# Altium PCB PCB1.PcbDoc (part 2 of 3)
Units mm, origin at the board's own origin, x right, y up, seen from the top; angles counter-clockwise.
Board outline 72.9 x 52.07 mm, 2 copper layers (Top Layer, Bottom Layer); 22 components, 35 nets, 99 pads, 0 vias.
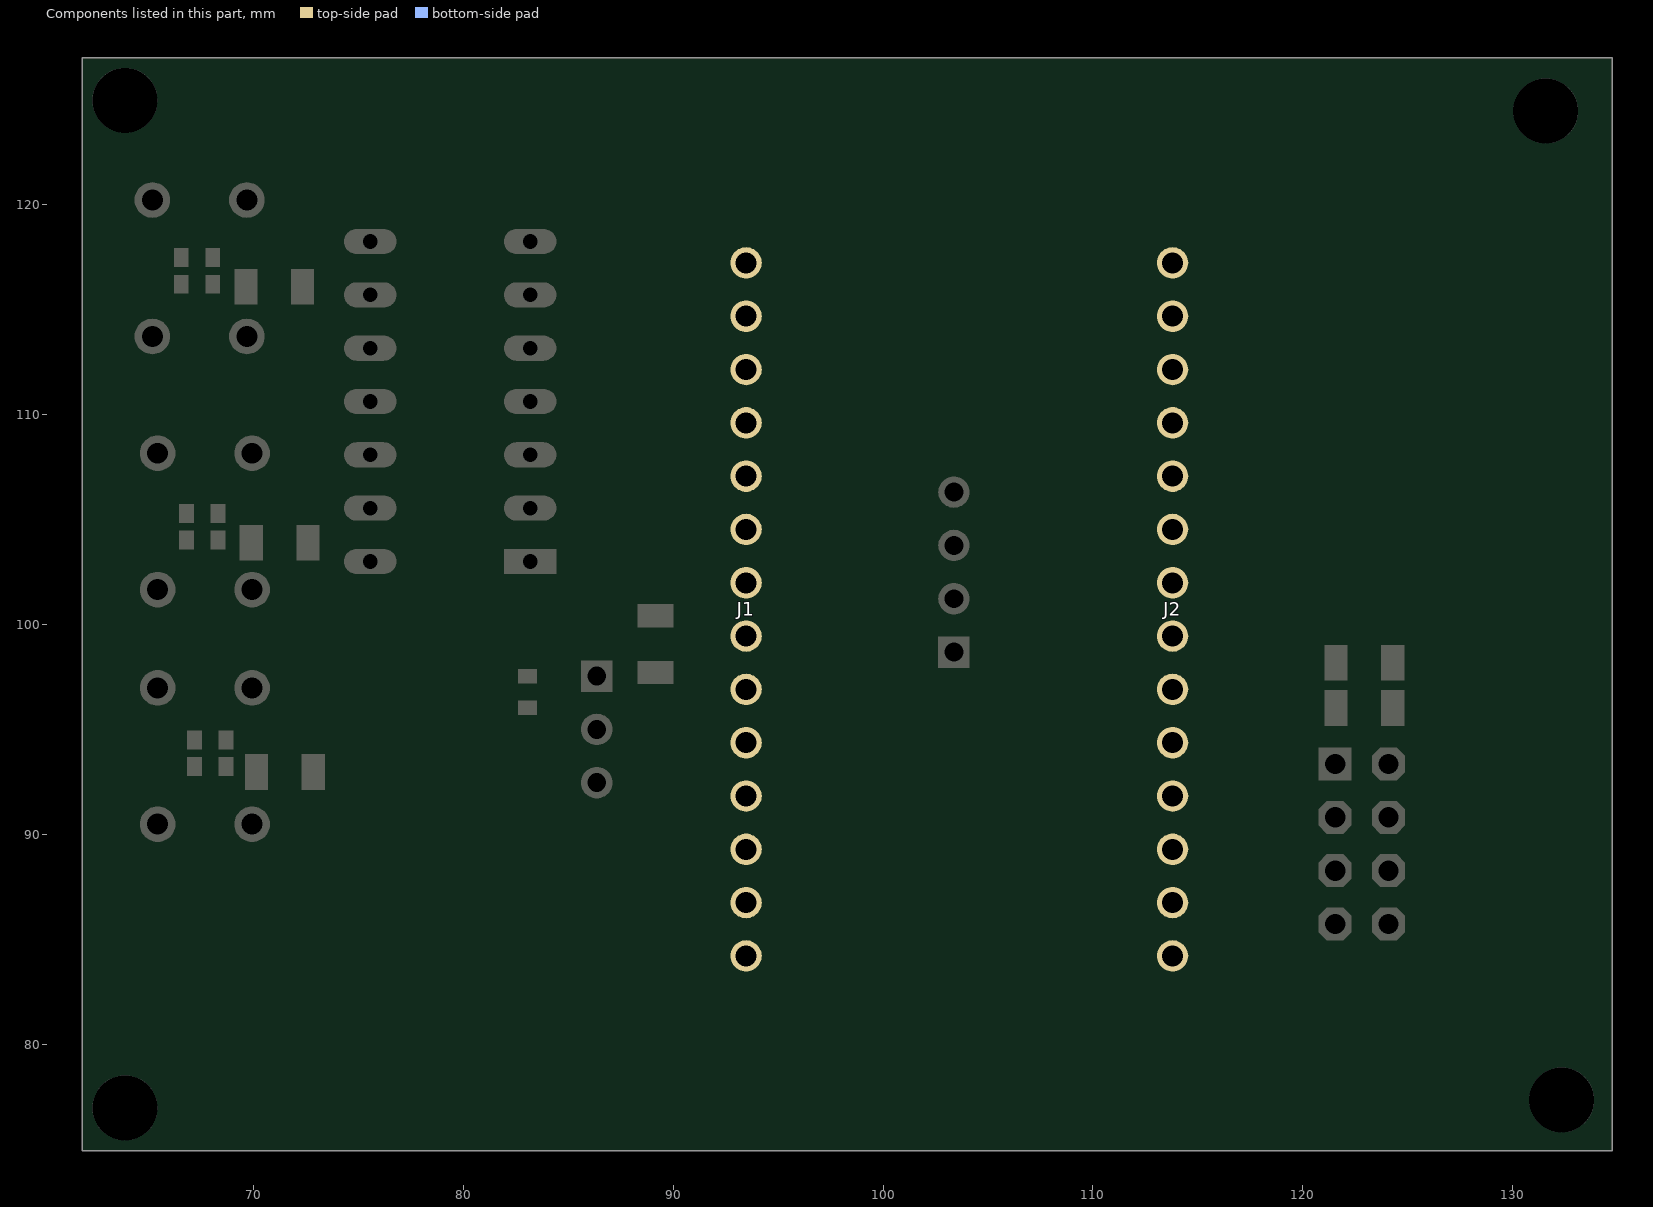
[diagram p2: the components of this part, seen from the top]

## Footprints (in the part's own frame and the unit in brackets; to place one, negate y for a bottom-side part, rotate by r counter-clockwise, add the part's x,y. Pads: shape width x height; smd on the part's side, far side on the other; paste and mask are expansions set on the pad) (continued)
STRIP-14 [mm]
  round 1.5 hole 1: 1(0,17.907) 2(0,15.367) 3(0,12.827) 4(0,10.287) 5(0,7.747) 6(0,5.207) 7(0,2.667) 8(0,0.127) 9(0,-2.413) 10(0,-4.953) 11(0,-7.493) 12(0,-10.033) 13(0,-12.573) 14(0,-15.113)
  Top Layer region: 0.953,18.707 0.953,17.107 -0.953,17.107 -0.953,18.707
  Top Layer region: 0.14,-14.313 0.446,-14.374 0.705,-14.547 0.879,-14.807 0.94,-15.113 0.94,-15.113 0.879,-15.419 0.705,-15.679 0.446,-15.852 0.14,-15.913 0.14,-15.913 -0.14,-15.913 -0.446,-15.852 -0.705,-15.679 -0.879,-15.419 -0.94,-15.113 -0.94,-15.113 -0.879,-14.807 -0.705,-14.547 -0.446,-14.374 -0.14,-14.313 -0.14,-14.313
  Top Layer region: 0.14,-11.773 0.446,-11.834 0.705,-12.007 0.879,-12.267 0.94,-12.573 0.94,-12.573 0.879,-12.879 0.705,-13.139 0.446,-13.312 0.14,-13.373 0.14,-13.373 -0.14,-13.373 -0.446,-13.312 -0.705,-13.139 -0.879,-12.879 -0.94,-12.573 -0.94,-12.573 -0.879,-12.267 -0.705,-12.007 -0.446,-11.834 -0.14,-11.773 -0.14,-11.773
  Top Layer region: 0.14,-9.233 0.446,-9.294 0.705,-9.467 0.879,-9.727 0.94,-10.033 0.94,-10.033 0.879,-10.339 0.705,-10.599 0.446,-10.772 0.14,-10.833 0.14,-10.833 -0.14,-10.833 -0.446,-10.772 -0.705,-10.599 -0.879,-10.339 -0.94,-10.033 -0.94,-10.033 -0.879,-9.727 -0.705,-9.467 -0.446,-9.294 -0.14,-9.233 -0.14,-9.233
  Top Layer region: 0.14,-6.693 0.446,-6.754 0.705,-6.927 0.879,-7.187 0.94,-7.493 0.94,-7.493 0.879,-7.799 0.705,-8.059 0.446,-8.232 0.14,-8.293 0.14,-8.293 -0.14,-8.293 -0.446,-8.232 -0.705,-8.059 -0.879,-7.799 -0.94,-7.493 -0.94,-7.493 -0.879,-7.187 -0.705,-6.927 -0.446,-6.754 -0.14,-6.693 -0.14,-6.693
  Top Layer region: 0.14,-4.153 0.446,-4.214 0.705,-4.387 0.879,-4.647 0.94,-4.953 0.94,-4.953 0.879,-5.259 0.705,-5.519 0.446,-5.692 0.14,-5.753 0.14,-5.753 -0.14,-5.753 -0.446,-5.692 -0.705,-5.519 -0.879,-5.259 -0.94,-4.953 -0.94,-4.953 -0.879,-4.647 -0.705,-4.387 -0.446,-4.214 -0.14,-4.153 -0.14,-4.153
  Top Layer region: 0.14,-1.613 0.446,-1.674 0.705,-1.847 0.879,-2.107 0.94,-2.413 0.94,-2.413 0.879,-2.719 0.705,-2.979 0.446,-3.152 0.14,-3.213 0.14,-3.213 -0.14,-3.213 -0.446,-3.152 -0.705,-2.979 -0.879,-2.719 -0.94,-2.413 -0.94,-2.413 -0.879,-2.107 -0.705,-1.847 -0.446,-1.674 -0.14,-1.613 -0.14,-1.613
  Top Layer region: 0.14,0.927 0.446,0.866 0.705,0.693 0.879,0.433 0.94,0.127 0.94,0.127 0.879,-0.179 0.705,-0.439 0.446,-0.612 0.14,-0.673 0.14,-0.673 -0.14,-0.673 -0.446,-0.612 -0.705,-0.439 -0.879,-0.179 -0.94,0.127 -0.94,0.127 -0.879,0.433 -0.705,0.693 -0.446,0.866 -0.14,0.927 -0.14,0.927
  Top Layer region: 0.14,3.467 0.446,3.406 0.705,3.233 0.879,2.973 0.94,2.667 0.94,2.667 0.879,2.361 0.705,2.101 0.446,1.928 0.14,1.867 0.14,1.867 -0.14,1.867 -0.446,1.928 -0.705,2.101 -0.879,2.361 -0.94,2.667 -0.94,2.667 -0.879,2.973 -0.705,3.233 -0.446,3.406 -0.14,3.467 -0.14,3.467
  Top Layer region: 0.14,6.007 0.446,5.946 0.705,5.773 0.879,5.513 0.94,5.207 0.94,5.207 0.879,4.901 0.705,4.641 0.446,4.468 0.14,4.407 0.14,4.407 -0.14,4.407 -0.446,4.468 -0.705,4.641 -0.879,4.901 -0.94,5.207 -0.94,5.207 -0.879,5.513 -0.705,5.773 -0.446,5.946 -0.14,6.007 -0.14,6.007
  Top Layer region: 0.14,8.547 0.446,8.486 0.705,8.313 0.879,8.053 0.94,7.747 0.94,7.747 0.879,7.441 0.705,7.181 0.446,7.008 0.14,6.947 0.14,6.947 -0.14,6.947 -0.446,7.008 -0.705,7.181 -0.879,7.441 -0.94,7.747 -0.94,7.747 -0.879,8.053 -0.705,8.313 -0.446,8.486 -0.14,8.547 -0.14,8.547
  Top Layer region: 0.14,11.087 0.446,11.026 0.705,10.853 0.879,10.593 0.94,10.287 0.94,10.287 0.879,9.981 0.705,9.721 0.446,9.548 0.14,9.487 0.14,9.487 -0.14,9.487 -0.446,9.548 -0.705,9.721 -0.879,9.981 -0.94,10.287 -0.94,10.287 -0.879,10.593 -0.705,10.853 -0.446,11.026 -0.14,11.087 -0.14,11.087
  Top Layer region: 0.14,13.627 0.446,13.566 0.705,13.393 0.879,13.133 0.94,12.827 0.94,12.827 0.879,12.521 0.705,12.261 0.446,12.088 0.14,12.027 0.14,12.027 -0.14,12.027 -0.446,12.088 -0.705,12.261 -0.879,12.521 -0.94,12.827 -0.94,12.827 -0.879,13.133 -0.705,13.393 -0.446,13.566 -0.14,13.627 -0.14,13.627
  Top Layer region: 0.14,16.167 0.446,16.106 0.705,15.933 0.879,15.673 0.94,15.367 0.94,15.367 0.879,15.061 0.705,14.801 0.446,14.628 0.14,14.567 0.14,14.567 -0.14,14.567 -0.446,14.628 -0.705,14.801 -0.879,15.061 -0.94,15.367 -0.94,15.367 -0.879,15.673 -0.705,15.933 -0.446,16.106 -0.14,16.167 -0.14,16.167
  Bottom Layer region: 0.152,-14.313 0.454,-14.373 0.709,-14.544 0.88,-14.799 0.94,-15.1 0.94,-15.1 0.94,-15.126 0.88,-15.427 0.709,-15.682 0.454,-15.853 0.152,-15.913 0.152,-15.913 -0.152,-15.913 -0.343,-15.888 -0.533,-15.811 -0.699,-15.697 -0.699,-15.469 -0.714,-15.391 -0.758,-15.325 -0.824,-15.281 -0.902,-15.265 -0.902,-15.265 -0.953,-15.265 -0.953,-15.862 -1.003,-15.913 -1.854,-15.913 -1.905,-15.862 -1.905,-14.364 -1.854,-14.313 -1.003,-14.313 -0.953,-14.364 -0.953,-14.961 -0.902,-14.961 -0.824,-14.945 -0.758,-14.901 -0.714,-14.835 -0.699,-14.757 -0.699,-14.757 -0.699,-14.529 -0.533,-14.414 -0.343,-14.351 -0.152,-14.313
  Bottom Layer region: 0.152,-14.313 0.454,-14.373 0.709,-14.544 0.88,-14.799 0.94,-15.1 0.94,-15.1 0.94,-15.126 0.88,-15.427 0.709,-15.682 0.454,-15.853 0.152,-15.913 0.152,-15.913 -0.152,-15.913 -0.343,-15.888 -0.533,-15.811 -0.699,-15.697 -0.699,-15.469 -0.714,-15.391 -0.758,-15.325 -0.824,-15.281 -0.902,-15.265 -0.902,-15.265 -0.953,-15.265 -0.953,-15.862 -1.003,-15.913 -1.854,-15.913 -1.905,-15.862 -1.905,-14.364 -1.854,-14.313 -1.003,-14.313 -0.953,-14.364 -0.953,-14.961 -0.902,-14.961 -0.824,-14.945 -0.758,-14.901 -0.714,-14.835 -0.699,-14.757 -0.699,-14.757 -0.699,-14.529 -0.533,-14.414 -0.343,-14.351 -0.152,-14.313
  Bottom Layer region: 0.152,-14.313 0.454,-14.373 0.709,-14.544 0.88,-14.799 0.94,-15.1 0.94,-15.1 0.94,-15.126 0.88,-15.427 0.709,-15.682 0.454,-15.853 0.152,-15.913 0.152,-15.913 -0.152,-15.913 -0.343,-15.888 -0.533,-15.811 -0.699,-15.697 -0.699,-15.469 -0.714,-15.391 -0.758,-15.325 -0.824,-15.281 -0.902,-15.265 -0.902,-15.265 -0.953,-15.265 -0.953,-15.862 -1.003,-15.913 -1.854,-15.913 -1.905,-15.862 -1.905,-14.364 -1.854,-14.313 -1.003,-14.313 -0.953,-14.364 -0.953,-14.961 -0.902,-14.961 -0.824,-14.945 -0.758,-14.901 -0.714,-14.835 -0.699,-14.757 -0.699,-14.757 -0.699,-14.529 -0.533,-14.414 -0.343,-14.351 -0.152,-14.313
  Bottom Layer region: 0.152,-14.313 0.454,-14.373 0.709,-14.544 0.88,-14.799 0.94,-15.1 0.94,-15.1 0.94,-15.126 0.88,-15.427 0.709,-15.682 0.454,-15.853 0.152,-15.913 0.152,-15.913 -0.152,-15.913 -0.343,-15.888 -0.533,-15.811 -0.699,-15.697 -0.699,-15.469 -0.714,-15.391 -0.758,-15.325 -0.824,-15.281 -0.902,-15.265 -0.902,-15.265 -0.953,-15.265 -0.953,-15.862 -1.003,-15.913 -1.854,-15.913 -1.905,-15.862 -1.905,-14.364 -1.854,-14.313 -1.003,-14.313 -0.953,-14.364 -0.953,-14.961 -0.902,-14.961 -0.824,-14.945 -0.758,-14.901 -0.714,-14.835 -0.699,-14.757 -0.699,-14.757 -0.699,-14.529 -0.533,-14.414 -0.343,-14.351 -0.152,-14.313
  Bottom Layer region: 0.152,-14.313 0.454,-14.373 0.709,-14.544 0.88,-14.799 0.94,-15.1 0.94,-15.1 0.94,-15.126 0.88,-15.427 0.709,-15.682 0.454,-15.853 0.152,-15.913 0.152,-15.913 -0.152,-15.913 -0.343,-15.888 -0.533,-15.811 -0.699,-15.697 -0.699,-15.469 -0.714,-15.391 -0.758,-15.325 -0.824,-15.281 -0.902,-15.265 -0.902,-15.265 -0.953,-15.265 -0.953,-15.862 -1.003,-15.913 -1.854,-15.913 -1.905,-15.862 -1.905,-14.364 -1.854,-14.313 -1.003,-14.313 -0.953,-14.364 -0.953,-14.961 -0.902,-14.961 -0.824,-14.945 -0.758,-14.901 -0.714,-14.835 -0.699,-14.757 -0.699,-14.757 -0.699,-14.529 -0.533,-14.414 -0.343,-14.351 -0.152,-14.313
  Bottom Layer region: 0.152,-14.313 0.454,-14.373 0.709,-14.544 0.88,-14.799 0.94,-15.1 0.94,-15.1 0.94,-15.126 0.88,-15.427 0.709,-15.682 0.454,-15.853 0.152,-15.913 0.152,-15.913 -0.152,-15.913 -0.343,-15.888 -0.533,-15.811 -0.699,-15.697 -0.699,-15.469 -0.714,-15.391 -0.758,-15.325 -0.824,-15.281 -0.902,-15.265 -0.902,-15.265 -0.953,-15.265 -0.953,-15.862 -1.003,-15.913 -1.854,-15.913 -1.905,-15.862 -1.905,-14.364 -1.854,-14.313 -1.003,-14.313 -0.953,-14.364 -0.953,-14.961 -0.902,-14.961 -0.824,-14.945 -0.758,-14.901 -0.714,-14.835 -0.699,-14.757 -0.699,-14.757 -0.699,-14.529 -0.533,-14.414 -0.343,-14.351 -0.152,-14.313
  Bottom Layer region: 0.152,-14.313 0.454,-14.373 0.709,-14.544 0.88,-14.799 0.94,-15.1 0.94,-15.1 0.94,-15.126 0.88,-15.427 0.709,-15.682 0.454,-15.853 0.152,-15.913 0.152,-15.913 -0.152,-15.913 -0.343,-15.888 -0.533,-15.811 -0.699,-15.697 -0.699,-15.469 -0.714,-15.391 -0.758,-15.325 -0.824,-15.281 -0.902,-15.265 -0.902,-15.265 -0.953,-15.265 -0.953,-15.862 -1.003,-15.913 -1.854,-15.913 -1.905,-15.862 -1.905,-14.364 -1.854,-14.313 -1.003,-14.313 -0.953,-14.364 -0.953,-14.961 -0.902,-14.961 -0.824,-14.945 -0.758,-14.901 -0.714,-14.835 -0.699,-14.757 -0.699,-14.757 -0.699,-14.529 -0.533,-14.414 -0.343,-14.351 -0.152,-14.313
  Bottom Layer region: 0.152,-11.773 0.454,-11.833 0.709,-12.004 0.88,-12.259 0.94,-12.56 0.94,-12.56 0.94,-12.586 0.88,-12.887 0.709,-13.142 0.454,-13.313 0.152,-13.373 0.152,-13.373 -0.152,-13.373 -0.343,-13.348 -0.533,-13.271 -0.699,-13.157 -0.699,-12.929 -0.714,-12.851 -0.758,-12.785 -0.824,-12.741 -0.902,-12.725 -0.902,-12.725 -0.953,-12.725 -0.953,-13.322 -1.003,-13.373 -1.854,-13.373 -1.905,-13.322 -1.905,-11.824 -1.854,-11.773 -1.003,-11.773 -0.953,-11.824 -0.953,-12.421 -0.902,-12.421 -0.824,-12.405 -0.758,-12.361 -0.714,-12.295 -0.699,-12.217 -0.699,-12.217 -0.699,-11.989 -0.533,-11.874 -0.343,-11.811 -0.152,-11.773
  Bottom Layer region: 0.152,-11.773 0.454,-11.833 0.709,-12.004 0.88,-12.259 0.94,-12.56 0.94,-12.56 0.94,-12.586 0.88,-12.887 0.709,-13.142 0.454,-13.313 0.152,-13.373 0.152,-13.373 -0.152,-13.373 -0.343,-13.348 -0.533,-13.271 -0.699,-13.157 -0.699,-12.929 -0.714,-12.851 -0.758,-12.785 -0.824,-12.741 -0.902,-12.725 -0.902,-12.725 -0.953,-12.725 -0.953,-13.322 -1.003,-13.373 -1.854,-13.373 -1.905,-13.322 -1.905,-11.824 -1.854,-11.773 -1.003,-11.773 -0.953,-11.824 -0.953,-12.421 -0.902,-12.421 -0.824,-12.405 -0.758,-12.361 -0.714,-12.295 -0.699,-12.217 -0.699,-12.217 -0.699,-11.989 -0.533,-11.874 -0.343,-11.811 -0.152,-11.773
  Bottom Layer region: 0.152,-11.773 0.454,-11.833 0.709,-12.004 0.88,-12.259 0.94,-12.56 0.94,-12.56 0.94,-12.586 0.88,-12.887 0.709,-13.142 0.454,-13.313 0.152,-13.373 0.152,-13.373 -0.152,-13.373 -0.343,-13.348 -0.533,-13.271 -0.699,-13.157 -0.699,-12.929 -0.714,-12.851 -0.758,-12.785 -0.824,-12.741 -0.902,-12.725 -0.902,-12.725 -0.953,-12.725 -0.953,-13.322 -1.003,-13.373 -1.854,-13.373 -1.905,-13.322 -1.905,-11.824 -1.854,-11.773 -1.003,-11.773 -0.953,-11.824 -0.953,-12.421 -0.902,-12.421 -0.824,-12.405 -0.758,-12.361 -0.714,-12.295 -0.699,-12.217 -0.699,-12.217 -0.699,-11.989 -0.533,-11.874 -0.343,-11.811 -0.152,-11.773
  Bottom Layer region: 0.152,-11.773 0.454,-11.833 0.709,-12.004 0.88,-12.259 0.94,-12.56 0.94,-12.56 0.94,-12.586 0.88,-12.887 0.709,-13.142 0.454,-13.313 0.152,-13.373 0.152,-13.373 -0.152,-13.373 -0.343,-13.348 -0.533,-13.271 -0.699,-13.157 -0.699,-12.929 -0.714,-12.851 -0.758,-12.785 -0.824,-12.741 -0.902,-12.725 -0.902,-12.725 -0.953,-12.725 -0.953,-13.322 -1.003,-13.373 -1.854,-13.373 -1.905,-13.322 -1.905,-11.824 -1.854,-11.773 -1.003,-11.773 -0.953,-11.824 -0.953,-12.421 -0.902,-12.421 -0.824,-12.405 -0.758,-12.361 -0.714,-12.295 -0.699,-12.217 -0.699,-12.217 -0.699,-11.989 -0.533,-11.874 -0.343,-11.811 -0.152,-11.773
  Bottom Layer region: 0.152,-11.773 0.454,-11.833 0.709,-12.004 0.88,-12.259 0.94,-12.56 0.94,-12.56 0.94,-12.586 0.88,-12.887 0.709,-13.142 0.454,-13.313 0.152,-13.373 0.152,-13.373 -0.152,-13.373 -0.343,-13.348 -0.533,-13.271 -0.699,-13.157 -0.699,-12.929 -0.714,-12.851 -0.758,-12.785 -0.824,-12.741 -0.902,-12.725 -0.902,-12.725 -0.953,-12.725 -0.953,-13.322 -1.003,-13.373 -1.854,-13.373 -1.905,-13.322 -1.905,-11.824 -1.854,-11.773 -1.003,-11.773 -0.953,-11.824 -0.953,-12.421 -0.902,-12.421 -0.824,-12.405 -0.758,-12.361 -0.714,-12.295 -0.699,-12.217 -0.699,-12.217 -0.699,-11.989 -0.533,-11.874 -0.343,-11.811 -0.152,-11.773
  Bottom Layer region: 0.152,-11.773 0.454,-11.833 0.709,-12.004 0.88,-12.259 0.94,-12.56 0.94,-12.56 0.94,-12.586 0.88,-12.887 0.709,-13.142 0.454,-13.313 0.152,-13.373 0.152,-13.373 -0.152,-13.373 -0.343,-13.348 -0.533,-13.271 -0.699,-13.157 -0.699,-12.929 -0.714,-12.851 -0.758,-12.785 -0.824,-12.741 -0.902,-12.725 -0.902,-12.725 -0.953,-12.725 -0.953,-13.322 -1.003,-13.373 -1.854,-13.373 -1.905,-13.322 -1.905,-11.824 -1.854,-11.773 -1.003,-11.773 -0.953,-11.824 -0.953,-12.421 -0.902,-12.421 -0.824,-12.405 -0.758,-12.361 -0.714,-12.295 -0.699,-12.217 -0.699,-12.217 -0.699,-11.989 -0.533,-11.874 -0.343,-11.811 -0.152,-11.773
  Bottom Layer region: 0.152,-11.773 0.454,-11.833 0.709,-12.004 0.88,-12.259 0.94,-12.56 0.94,-12.56 0.94,-12.586 0.88,-12.887 0.709,-13.142 0.454,-13.313 0.152,-13.373 0.152,-13.373 -0.152,-13.373 -0.343,-13.348 -0.533,-13.271 -0.699,-13.157 -0.699,-12.929 -0.714,-12.851 -0.758,-12.785 -0.824,-12.741 -0.902,-12.725 -0.902,-12.725 -0.953,-12.725 -0.953,-13.322 -1.003,-13.373 -1.854,-13.373 -1.905,-13.322 -1.905,-11.824 -1.854,-11.773 -1.003,-11.773 -0.953,-11.824 -0.953,-12.421 -0.902,-12.421 -0.824,-12.405 -0.758,-12.361 -0.714,-12.295 -0.699,-12.217 -0.699,-12.217 -0.699,-11.989 -0.533,-11.874 -0.343,-11.811 -0.152,-11.773
  Bottom Layer region: 0.152,-9.233 0.454,-9.293 0.709,-9.464 0.88,-9.719 0.94,-10.02 0.94,-10.02 0.94,-10.046 0.88,-10.347 0.709,-10.602 0.454,-10.773 0.152,-10.833 0.152,-10.833 -0.152,-10.833 -0.343,-10.808 -0.533,-10.731 -0.699,-10.617 -0.699,-10.389 -0.714,-10.311 -0.758,-10.245 -0.824,-10.201 -0.902,-10.185 -0.902,-10.185 -0.953,-10.185 -0.953,-10.782 -1.003,-10.833 -1.854,-10.833 -1.905,-10.782 -1.905,-9.284 -1.854,-9.233 -1.003,-9.233 -0.953,-9.284 -0.953,-9.881 -0.902,-9.881 -0.824,-9.865 -0.758,-9.821 -0.714,-9.755 -0.699,-9.677 -0.699,-9.677 -0.699,-9.449 -0.533,-9.335 -0.343,-9.271 -0.152,-9.233
  Bottom Layer region: 0.152,-9.233 0.454,-9.293 0.709,-9.464 0.88,-9.719 0.94,-10.02 0.94,-10.02 0.94,-10.046 0.88,-10.347 0.709,-10.602 0.454,-10.773 0.152,-10.833 0.152,-10.833 -0.152,-10.833 -0.343,-10.808 -0.533,-10.731 -0.699,-10.617 -0.699,-10.389 -0.714,-10.311 -0.758,-10.245 -0.824,-10.201 -0.902,-10.185 -0.902,-10.185 -0.953,-10.185 -0.953,-10.782 -1.003,-10.833 -1.854,-10.833 -1.905,-10.782 -1.905,-9.284 -1.854,-9.233 -1.003,-9.233 -0.953,-9.284 -0.953,-9.881 -0.902,-9.881 -0.824,-9.865 -0.758,-9.821 -0.714,-9.755 -0.699,-9.677 -0.699,-9.677 -0.699,-9.449 -0.533,-9.335 -0.343,-9.271 -0.152,-9.233
  Bottom Layer region: 0.152,-9.233 0.454,-9.293 0.709,-9.464 0.88,-9.719 0.94,-10.02 0.94,-10.02 0.94,-10.046 0.88,-10.347 0.709,-10.602 0.454,-10.773 0.152,-10.833 0.152,-10.833 -0.152,-10.833 -0.343,-10.808 -0.533,-10.731 -0.699,-10.617 -0.699,-10.389 -0.714,-10.311 -0.758,-10.245 -0.824,-10.201 -0.902,-10.185 -0.902,-10.185 -0.953,-10.185 -0.953,-10.782 -1.003,-10.833 -1.854,-10.833 -1.905,-10.782 -1.905,-9.284 -1.854,-9.233 -1.003,-9.233 -0.953,-9.284 -0.953,-9.881 -0.902,-9.881 -0.824,-9.865 -0.758,-9.821 -0.714,-9.755 -0.699,-9.677 -0.699,-9.677 -0.699,-9.449 -0.533,-9.335 -0.343,-9.271 -0.152,-9.233
  Bottom Layer region: 0.152,-9.233 0.454,-9.293 0.709,-9.464 0.88,-9.719 0.94,-10.02 0.94,-10.02 0.94,-10.046 0.88,-10.347 0.709,-10.602 0.454,-10.773 0.152,-10.833 0.152,-10.833 -0.152,-10.833 -0.343,-10.808 -0.533,-10.731 -0.699,-10.617 -0.699,-10.389 -0.714,-10.311 -0.758,-10.245 -0.824,-10.201 -0.902,-10.185 -0.902,-10.185 -0.953,-10.185 -0.953,-10.782 -1.003,-10.833 -1.854,-10.833 -1.905,-10.782 -1.905,-9.284 -1.854,-9.233 -1.003,-9.233 -0.953,-9.284 -0.953,-9.881 -0.902,-9.881 -0.824,-9.865 -0.758,-9.821 -0.714,-9.755 -0.699,-9.677 -0.699,-9.677 -0.699,-9.449 -0.533,-9.335 -0.343,-9.271 -0.152,-9.233
  Bottom Layer region: 0.152,-9.233 0.454,-9.293 0.709,-9.464 0.88,-9.719 0.94,-10.02 0.94,-10.02 0.94,-10.046 0.88,-10.347 0.709,-10.602 0.454,-10.773 0.152,-10.833 0.152,-10.833 -0.152,-10.833 -0.343,-10.808 -0.533,-10.731 -0.699,-10.617 -0.699,-10.389 -0.714,-10.311 -0.758,-10.245 -0.824,-10.201 -0.902,-10.185 -0.902,-10.185 -0.953,-10.185 -0.953,-10.782 -1.003,-10.833 -1.854,-10.833 -1.905,-10.782 -1.905,-9.284 -1.854,-9.233 -1.003,-9.233 -0.953,-9.284 -0.953,-9.881 -0.902,-9.881 -0.824,-9.865 -0.758,-9.821 -0.714,-9.755 -0.699,-9.677 -0.699,-9.677 -0.699,-9.449 -0.533,-9.335 -0.343,-9.271 -0.152,-9.233
  Bottom Layer region: 0.152,-9.233 0.454,-9.293 0.709,-9.464 0.88,-9.719 0.94,-10.02 0.94,-10.02 0.94,-10.046 0.88,-10.347 0.709,-10.602 0.454,-10.773 0.152,-10.833 0.152,-10.833 -0.152,-10.833 -0.343,-10.808 -0.533,-10.731 -0.699,-10.617 -0.699,-10.389 -0.714,-10.311 -0.758,-10.245 -0.824,-10.201 -0.902,-10.185 -0.902,-10.185 -0.953,-10.185 -0.953,-10.782 -1.003,-10.833 -1.854,-10.833 -1.905,-10.782 -1.905,-9.284 -1.854,-9.233 -1.003,-9.233 -0.953,-9.284 -0.953,-9.881 -0.902,-9.881 -0.824,-9.865 -0.758,-9.821 -0.714,-9.755 -0.699,-9.677 -0.699,-9.677 -0.699,-9.449 -0.533,-9.335 -0.343,-9.271 -0.152,-9.233
  Bottom Layer region: 0.152,-9.233 0.454,-9.293 0.709,-9.464 0.88,-9.719 0.94,-10.02 0.94,-10.02 0.94,-10.046 0.88,-10.347 0.709,-10.602 0.454,-10.773 0.152,-10.833 0.152,-10.833 -0.152,-10.833 -0.343,-10.808 -0.533,-10.731 -0.699,-10.617 -0.699,-10.389 -0.714,-10.311 -0.758,-10.245 -0.824,-10.201 -0.902,-10.185 -0.902,-10.185 -0.953,-10.185 -0.953,-10.782 -1.003,-10.833 -1.854,-10.833 -1.905,-10.782 -1.905,-9.284 -1.854,-9.233 -1.003,-9.233 -0.953,-9.284 -0.953,-9.881 -0.902,-9.881 -0.824,-9.865 -0.758,-9.821 -0.714,-9.755 -0.699,-9.677 -0.699,-9.677 -0.699,-9.449 -0.533,-9.335 -0.343,-9.271 -0.152,-9.233
  Bottom Layer region: 0.152,-6.693 0.454,-6.753 0.709,-6.924 0.88,-7.179 0.94,-7.48 0.94,-7.48 0.94,-7.506 0.88,-7.807 0.709,-8.062 0.454,-8.233 0.152,-8.293 0.152,-8.293 -0.152,-8.293 -0.343,-8.268 -0.533,-8.191 -0.699,-8.077 -0.699,-7.849 -0.714,-7.771 -0.758,-7.705 -0.824,-7.661 -0.902,-7.645 -0.902,-7.645 -0.953,-7.645 -0.953,-8.242 -1.003,-8.293 -1.854,-8.293 -1.905,-8.242 -1.905,-6.744 -1.854,-6.693 -1.003,-6.693 -0.953,-6.744 -0.953,-7.341 -0.902,-7.341 -0.824,-7.325 -0.758,-7.281 -0.714,-7.215 -0.699,-7.137 -0.699,-7.137 -0.699,-6.909 -0.533,-6.794 -0.343,-6.731 -0.152,-6.693
  Bottom Layer region: 0.152,-6.693 0.454,-6.753 0.709,-6.924 0.88,-7.179 0.94,-7.48 0.94,-7.48 0.94,-7.506 0.88,-7.807 0.709,-8.062 0.454,-8.233 0.152,-8.293 0.152,-8.293 -0.152,-8.293 -0.343,-8.268 -0.533,-8.191 -0.699,-8.077 -0.699,-7.849 -0.714,-7.771 -0.758,-7.705 -0.824,-7.661 -0.902,-7.645 -0.902,-7.645 -0.953,-7.645 -0.953,-8.242 -1.003,-8.293 -1.854,-8.293 -1.905,-8.242 -1.905,-6.744 -1.854,-6.693 -1.003,-6.693 -0.953,-6.744 -0.953,-7.341 -0.902,-7.341 -0.824,-7.325 -0.758,-7.281 -0.714,-7.215 -0.699,-7.137 -0.699,-7.137 -0.699,-6.909 -0.533,-6.794 -0.343,-6.731 -0.152,-6.693
  Bottom Layer region: 0.152,-6.693 0.454,-6.753 0.709,-6.924 0.88,-7.179 0.94,-7.48 0.94,-7.48 0.94,-7.506 0.88,-7.807 0.709,-8.062 0.454,-8.233 0.152,-8.293 0.152,-8.293 -0.152,-8.293 -0.343,-8.268 -0.533,-8.191 -0.699,-8.077 -0.699,-7.849 -0.714,-7.771 -0.758,-7.705 -0.824,-7.661 -0.902,-7.645 -0.902,-7.645 -0.953,-7.645 -0.953,-8.242 -1.003,-8.293 -1.854,-8.293 -1.905,-8.242 -1.905,-6.744 -1.854,-6.693 -1.003,-6.693 -0.953,-6.744 -0.953,-7.341 -0.902,-7.341 -0.824,-7.325 -0.758,-7.281 -0.714,-7.215 -0.699,-7.137 -0.699,-7.137 -0.699,-6.909 -0.533,-6.794 -0.343,-6.731 -0.152,-6.693
  Bottom Layer region: 0.152,-6.693 0.454,-6.753 0.709,-6.924 0.88,-7.179 0.94,-7.48 0.94,-7.48 0.94,-7.506 0.88,-7.807 0.709,-8.062 0.454,-8.233 0.152,-8.293 0.152,-8.293 -0.152,-8.293 -0.343,-8.268 -0.533,-8.191 -0.699,-8.077 -0.699,-7.849 -0.714,-7.771 -0.758,-7.705 -0.824,-7.661 -0.902,-7.645 -0.902,-7.645 -0.953,-7.645 -0.953,-8.242 -1.003,-8.293 -1.854,-8.293 -1.905,-8.242 -1.905,-6.744 -1.854,-6.693 -1.003,-6.693 -0.953,-6.744 -0.953,-7.341 -0.902,-7.341 -0.824,-7.325 -0.758,-7.281 -0.714,-7.215 -0.699,-7.137 -0.699,-7.137 -0.699,-6.909 -0.533,-6.794 -0.343,-6.731 -0.152,-6.693
  Bottom Layer region: 0.152,-6.693 0.454,-6.753 0.709,-6.924 0.88,-7.179 0.94,-7.48 0.94,-7.48 0.94,-7.506 0.88,-7.807 0.709,-8.062 0.454,-8.233 0.152,-8.293 0.152,-8.293 -0.152,-8.293 -0.343,-8.268 -0.533,-8.191 -0.699,-8.077 -0.699,-7.849 -0.714,-7.771 -0.758,-7.705 -0.824,-7.661 -0.902,-7.645 -0.902,-7.645 -0.953,-7.645 -0.953,-8.242 -1.003,-8.293 -1.854,-8.293 -1.905,-8.242 -1.905,-6.744 -1.854,-6.693 -1.003,-6.693 -0.953,-6.744 -0.953,-7.341 -0.902,-7.341 -0.824,-7.325 -0.758,-7.281 -0.714,-7.215 -0.699,-7.137 -0.699,-7.137 -0.699,-6.909 -0.533,-6.794 -0.343,-6.731 -0.152,-6.693
  Bottom Layer region: 0.152,-6.693 0.454,-6.753 0.709,-6.924 0.88,-7.179 0.94,-7.48 0.94,-7.48 0.94,-7.506 0.88,-7.807 0.709,-8.062 0.454,-8.233 0.152,-8.293 0.152,-8.293 -0.152,-8.293 -0.343,-8.268 -0.533,-8.191 -0.699,-8.077 -0.699,-7.849 -0.714,-7.771 -0.758,-7.705 -0.824,-7.661 -0.902,-7.645 -0.902,-7.645 -0.953,-7.645 -0.953,-8.242 -1.003,-8.293 -1.854,-8.293 -1.905,-8.242 -1.905,-6.744 -1.854,-6.693 -1.003,-6.693 -0.953,-6.744 -0.953,-7.341 -0.902,-7.341 -0.824,-7.325 -0.758,-7.281 -0.714,-7.215 -0.699,-7.137 -0.699,-7.137 -0.699,-6.909 -0.533,-6.794 -0.343,-6.731 -0.152,-6.693
  Bottom Layer region: 0.152,-6.693 0.454,-6.753 0.709,-6.924 0.88,-7.179 0.94,-7.48 0.94,-7.48 0.94,-7.506 0.88,-7.807 0.709,-8.062 0.454,-8.233 0.152,-8.293 0.152,-8.293 -0.152,-8.293 -0.343,-8.268 -0.533,-8.191 -0.699,-8.077 -0.699,-7.849 -0.714,-7.771 -0.758,-7.705 -0.824,-7.661 -0.902,-7.645 -0.902,-7.645 -0.953,-7.645 -0.953,-8.242 -1.003,-8.293 -1.854,-8.293 -1.905,-8.242 -1.905,-6.744 -1.854,-6.693 -1.003,-6.693 -0.953,-6.744 -0.953,-7.341 -0.902,-7.341 -0.824,-7.325 -0.758,-7.281 -0.714,-7.215 -0.699,-7.137 -0.699,-7.137 -0.699,-6.909 -0.533,-6.794 -0.343,-6.731 -0.152,-6.693
  Bottom Layer region: 0.152,-4.153 0.454,-4.213 0.709,-4.384 0.88,-4.639 0.94,-4.94 0.94,-4.94 0.94,-4.966 0.88,-5.267 0.709,-5.522 0.454,-5.693 0.152,-5.753 0.152,-5.753 -0.152,-5.753 -0.343,-5.728 -0.533,-5.651 -0.699,-5.537 -0.699,-5.309 -0.714,-5.231 -0.758,-5.165 -0.824,-5.121 -0.902,-5.105 -0.902,-5.105 -0.953,-5.105 -0.953,-5.702 -1.003,-5.753 -1.854,-5.753 -1.905,-5.702 -1.905,-4.204 -1.854,-4.153 -1.003,-4.153 -0.953,-4.204 -0.953,-4.801 -0.902,-4.801 -0.824,-4.785 -0.758,-4.741 -0.714,-4.675 -0.699,-4.597 -0.699,-4.597 -0.699,-4.369 -0.533,-4.255 -0.343,-4.191 -0.152,-4.153
  Bottom Layer region: 0.152,-4.153 0.454,-4.213 0.709,-4.384 0.88,-4.639 0.94,-4.94 0.94,-4.94 0.94,-4.966 0.88,-5.267 0.709,-5.522 0.454,-5.693 0.152,-5.753 0.152,-5.753 -0.152,-5.753 -0.343,-5.728 -0.533,-5.651 -0.699,-5.537 -0.699,-5.309 -0.714,-5.231 -0.758,-5.165 -0.824,-5.121 -0.902,-5.105 -0.902,-5.105 -0.953,-5.105 -0.953,-5.702 -1.003,-5.753 -1.854,-5.753 -1.905,-5.702 -1.905,-4.204 -1.854,-4.153 -1.003,-4.153 -0.953,-4.204 -0.953,-4.801 -0.902,-4.801 -0.824,-4.785 -0.758,-4.741 -0.714,-4.675 -0.699,-4.597 -0.699,-4.597 -0.699,-4.369 -0.533,-4.255 -0.343,-4.191 -0.152,-4.153
  Bottom Layer region: 0.152,-4.153 0.454,-4.213 0.709,-4.384 0.88,-4.639 0.94,-4.94 0.94,-4.94 0.94,-4.966 0.88,-5.267 0.709,-5.522 0.454,-5.693 0.152,-5.753 0.152,-5.753 -0.152,-5.753 -0.343,-5.728 -0.533,-5.651 -0.699,-5.537 -0.699,-5.309 -0.714,-5.231 -0.758,-5.165 -0.824,-5.121 -0.902,-5.105 -0.902,-5.105 -0.953,-5.105 -0.953,-5.702 -1.003,-5.753 -1.854,-5.753 -1.905,-5.702 -1.905,-4.204 -1.854,-4.153 -1.003,-4.153 -0.953,-4.204 -0.953,-4.801 -0.902,-4.801 -0.824,-4.785 -0.758,-4.741 -0.714,-4.675 -0.699,-4.597 -0.699,-4.597 -0.699,-4.369 -0.533,-4.255 -0.343,-4.191 -0.152,-4.153
  Bottom Layer region: 0.152,-4.153 0.454,-4.213 0.709,-4.384 0.88,-4.639 0.94,-4.94 0.94,-4.94 0.94,-4.966 0.88,-5.267 0.709,-5.522 0.454,-5.693 0.152,-5.753 0.152,-5.753 -0.152,-5.753 -0.343,-5.728 -0.533,-5.651 -0.699,-5.537 -0.699,-5.309 -0.714,-5.231 -0.758,-5.165 -0.824,-5.121 -0.902,-5.105 -0.902,-5.105 -0.953,-5.105 -0.953,-5.702 -1.003,-5.753 -1.854,-5.753 -1.905,-5.702 -1.905,-4.204 -1.854,-4.153 -1.003,-4.153 -0.953,-4.204 -0.953,-4.801 -0.902,-4.801 -0.824,-4.785 -0.758,-4.741 -0.714,-4.675 -0.699,-4.597 -0.699,-4.597 -0.699,-4.369 -0.533,-4.255 -0.343,-4.191 -0.152,-4.153
  Bottom Layer region: 0.152,-4.153 0.454,-4.213 0.709,-4.384 0.88,-4.639 0.94,-4.94 0.94,-4.94 0.94,-4.966 0.88,-5.267 0.709,-5.522 0.454,-5.693 0.152,-5.753 0.152,-5.753 -0.152,-5.753 -0.343,-5.728 -0.533,-5.651 -0.699,-5.537 -0.699,-5.309 -0.714,-5.231 -0.758,-5.165 -0.824,-5.121 -0.902,-5.105 -0.902,-5.105 -0.953,-5.105 -0.953,-5.702 -1.003,-5.753 -1.854,-5.753 -1.905,-5.702 -1.905,-4.204 -1.854,-4.153 -1.003,-4.153 -0.953,-4.204 -0.953,-4.801 -0.902,-4.801 -0.824,-4.785 -0.758,-4.741 -0.714,-4.675 -0.699,-4.597 -0.699,-4.597 -0.699,-4.369 -0.533,-4.255 -0.343,-4.191 -0.152,-4.153
  Bottom Layer region: 0.152,-4.153 0.454,-4.213 0.709,-4.384 0.88,-4.639 0.94,-4.94 0.94,-4.94 0.94,-4.966 0.88,-5.267 0.709,-5.522 0.454,-5.693 0.152,-5.753 0.152,-5.753 -0.152,-5.753 -0.343,-5.728 -0.533,-5.651 -0.699,-5.537 -0.699,-5.309 -0.714,-5.231 -0.758,-5.165 -0.824,-5.121 -0.902,-5.105 -0.902,-5.105 -0.953,-5.105 -0.953,-5.702 -1.003,-5.753 -1.854,-5.753 -1.905,-5.702 -1.905,-4.204 -1.854,-4.153 -1.003,-4.153 -0.953,-4.204 -0.953,-4.801 -0.902,-4.801 -0.824,-4.785 -0.758,-4.741 -0.714,-4.675 -0.699,-4.597 -0.699,-4.597 -0.699,-4.369 -0.533,-4.255 -0.343,-4.191 -0.152,-4.153
  Bottom Layer region: 0.152,-4.153 0.454,-4.213 0.709,-4.384 0.88,-4.639 0.94,-4.94 0.94,-4.94 0.94,-4.966 0.88,-5.267 0.709,-5.522 0.454,-5.693 0.152,-5.753 0.152,-5.753 -0.152,-5.753 -0.343,-5.728 -0.533,-5.651 -0.699,-5.537 -0.699,-5.309 -0.714,-5.231 -0.758,-5.165 -0.824,-5.121 -0.902,-5.105 -0.902,-5.105 -0.953,-5.105 -0.953,-5.702 -1.003,-5.753 -1.854,-5.753 -1.905,-5.702 -1.905,-4.204 -1.854,-4.153 -1.003,-4.153 -0.953,-4.204 -0.953,-4.801 -0.902,-4.801 -0.824,-4.785 -0.758,-4.741 -0.714,-4.675 -0.699,-4.597 -0.699,-4.597 -0.699,-4.369 -0.533,-4.255 -0.343,-4.191 -0.152,-4.153
  Bottom Layer region: 0.152,-1.613 0.454,-1.673 0.709,-1.844 0.88,-2.099 0.94,-2.4 0.94,-2.4 0.94,-2.426 0.88,-2.727 0.709,-2.982 0.454,-3.153 0.152,-3.213 0.152,-3.213 -0.152,-3.213 -0.343,-3.188 -0.533,-3.111 -0.699,-2.997 -0.699,-2.769 -0.714,-2.691 -0.758,-2.625 -0.824,-2.581 -0.902,-2.565 -0.902,-2.565 -0.953,-2.565 -0.953,-3.162 -1.003,-3.213 -1.854,-3.213 -1.905,-3.162 -1.905,-1.664 -1.854,-1.613 -1.003,-1.613 -0.953,-1.664 -0.953,-2.261 -0.902,-2.261 -0.824,-2.245 -0.758,-2.201 -0.714,-2.135 -0.699,-2.057 -0.699,-2.057 -0.699,-1.829 -0.533,-1.714 -0.343,-1.651 -0.152,-1.613
  Bottom Layer region: 0.152,-1.613 0.454,-1.673 0.709,-1.844 0.88,-2.099 0.94,-2.4 0.94,-2.4 0.94,-2.426 0.88,-2.727 0.709,-2.982 0.454,-3.153 0.152,-3.213 0.152,-3.213 -0.152,-3.213 -0.343,-3.188 -0.533,-3.111 -0.699,-2.997 -0.699,-2.769 -0.714,-2.691 -0.758,-2.625 -0.824,-2.581 -0.902,-2.565 -0.902,-2.565 -0.953,-2.565 -0.953,-3.162 -1.003,-3.213 -1.854,-3.213 -1.905,-3.162 -1.905,-1.664 -1.854,-1.613 -1.003,-1.613 -0.953,-1.664 -0.953,-2.261 -0.902,-2.261 -0.824,-2.245 -0.758,-2.201 -0.714,-2.135 -0.699,-2.057 -0.699,-2.057 -0.699,-1.829 -0.533,-1.714 -0.343,-1.651 -0.152,-1.613
  Bottom Layer region: 0.152,-1.613 0.454,-1.673 0.709,-1.844 0.88,-2.099 0.94,-2.4 0.94,-2.4 0.94,-2.426 0.88,-2.727 0.709,-2.982 0.454,-3.153 0.152,-3.213 0.152,-3.213 -0.152,-3.213 -0.343,-3.188 -0.533,-3.111 -0.699,-2.997 -0.699,-2.769 -0.714,-2.691 -0.758,-2.625 -0.824,-2.581 -0.902,-2.565 -0.902,-2.565 -0.953,-2.565 -0.953,-3.162 -1.003,-3.213 -1.854,-3.213 -1.905,-3.162 -1.905,-1.664 -1.854,-1.613 -1.003,-1.613 -0.953,-1.664 -0.953,-2.261 -0.902,-2.261 -0.824,-2.245 -0.758,-2.201 -0.714,-2.135 -0.699,-2.057 -0.699,-2.057 -0.699,-1.829 -0.533,-1.714 -0.343,-1.651 -0.152,-1.613
  Bottom Layer region: 0.152,-1.613 0.454,-1.673 0.709,-1.844 0.88,-2.099 0.94,-2.4 0.94,-2.4 0.94,-2.426 0.88,-2.727 0.709,-2.982 0.454,-3.153 0.152,-3.213 0.152,-3.213 -0.152,-3.213 -0.343,-3.188 -0.533,-3.111 -0.699,-2.997 -0.699,-2.769 -0.714,-2.691 -0.758,-2.625 -0.824,-2.581 -0.902,-2.565 -0.902,-2.565 -0.953,-2.565 -0.953,-3.162 -1.003,-3.213 -1.854,-3.213 -1.905,-3.162 -1.905,-1.664 -1.854,-1.613 -1.003,-1.613 -0.953,-1.664 -0.953,-2.261 -0.902,-2.261 -0.824,-2.245 -0.758,-2.201 -0.714,-2.135 -0.699,-2.057 -0.699,-2.057 -0.699,-1.829 -0.533,-1.714 -0.343,-1.651 -0.152,-1.613
  Bottom Layer region: 0.152,-1.613 0.454,-1.673 0.709,-1.844 0.88,-2.099 0.94,-2.4 0.94,-2.4 0.94,-2.426 0.88,-2.727 0.709,-2.982 0.454,-3.153 0.152,-3.213 0.152,-3.213 -0.152,-3.213 -0.343,-3.188 -0.533,-3.111 -0.699,-2.997 -0.699,-2.769 -0.714,-2.691 -0.758,-2.625 -0.824,-2.581 -0.902,-2.565 -0.902,-2.565 -0.953,-2.565 -0.953,-3.162 -1.003,-3.213 -1.854,-3.213 -1.905,-3.162 -1.905,-1.664 -1.854,-1.613 -1.003,-1.613 -0.953,-1.664 -0.953,-2.261 -0.902,-2.261 -0.824,-2.245 -0.758,-2.201 -0.714,-2.135 -0.699,-2.057 -0.699,-2.057 -0.699,-1.829 -0.533,-1.714 -0.343,-1.651 -0.152,-1.613
  Bottom Layer region: 0.152,-1.613 0.454,-1.673 0.709,-1.844 0.88,-2.099 0.94,-2.4 0.94,-2.4 0.94,-2.426 0.88,-2.727 0.709,-2.982 0.454,-3.153 0.152,-3.213 0.152,-3.213 -0.152,-3.213 -0.343,-3.188 -0.533,-3.111 -0.699,-2.997 -0.699,-2.769 -0.714,-2.691 -0.758,-2.625 -0.824,-2.581 -0.902,-2.565 -0.902,-2.565 -0.953,-2.565 -0.953,-3.162 -1.003,-3.213 -1.854,-3.213 -1.905,-3.162 -1.905,-1.664 -1.854,-1.613 -1.003,-1.613 -0.953,-1.664 -0.953,-2.261 -0.902,-2.261 -0.824,-2.245 -0.758,-2.201 -0.714,-2.135 -0.699,-2.057 -0.699,-2.057 -0.699,-1.829 -0.533,-1.714 -0.343,-1.651 -0.152,-1.613
  Bottom Layer region: 0.152,-1.613 0.454,-1.673 0.709,-1.844 0.88,-2.099 0.94,-2.4 0.94,-2.4 0.94,-2.426 0.88,-2.727 0.709,-2.982 0.454,-3.153 0.152,-3.213 0.152,-3.213 -0.152,-3.213 -0.343,-3.188 -0.533,-3.111 -0.699,-2.997 -0.699,-2.769 -0.714,-2.691 -0.758,-2.625 -0.824,-2.581 -0.902,-2.565 -0.902,-2.565 -0.953,-2.565 -0.953,-3.162 -1.003,-3.213 -1.854,-3.213 -1.905,-3.162 -1.905,-1.664 -1.854,-1.613 -1.003,-1.613 -0.953,-1.664 -0.953,-2.261 -0.902,-2.261 -0.824,-2.245 -0.758,-2.201 -0.714,-2.135 -0.699,-2.057 -0.699,-2.057 -0.699,-1.829 -0.533,-1.714 -0.343,-1.651 -0.152,-1.613
  Bottom Layer region: 0.152,0.927 0.454,0.867 0.709,0.696 0.88,0.441 0.94,0.14 0.94,0.14 0.94,0.114 0.88,-0.187 0.709,-0.442 0.454,-0.613 0.152,-0.673 0.152,-0.673 -0.152,-0.673 -0.343,-0.648 -0.533,-0.572 -0.699,-0.457 -0.699,-0.229 -0.714,-0.151 -0.758,-0.085 -0.824,-0.041 -0.902,-0.025 -0.902,-0.025 -0.953,-0.025 -0.953,-0.622 -1.003,-0.673 -1.854,-0.673 -1.905,-0.622 -1.905,0.876 -1.854,0.927 -1.003,0.927 -0.953,0.876 -0.953,0.279 -0.902,0.279 -0.824,0.295 -0.758,0.339 -0.714,0.405 -0.699,0.483 -0.699,0.483 -0.699,0.711 -0.533,0.826 -0.343,0.889 -0.152,0.927
  Bottom Layer region: 0.152,0.927 0.454,0.867 0.709,0.696 0.88,0.441 0.94,0.14 0.94,0.14 0.94,0.114 0.88,-0.187 0.709,-0.442 0.454,-0.613 0.152,-0.673 0.152,-0.673 -0.152,-0.673 -0.343,-0.648 -0.533,-0.572 -0.699,-0.457 -0.699,-0.229 -0.714,-0.151 -0.758,-0.085 -0.824,-0.041 -0.902,-0.025 -0.902,-0.025 -0.953,-0.025 -0.953,-0.622 -1.003,-0.673 -1.854,-0.673 -1.905,-0.622 -1.905,0.876 -1.854,0.927 -1.003,0.927 -0.953,0.876 -0.953,0.279 -0.902,0.279 -0.824,0.295 -0.758,0.339 -0.714,0.405 -0.699,0.483 -0.699,0.483 -0.699,0.711 -0.533,0.826 -0.343,0.889 -0.152,0.927
  Bottom Layer region: 0.152,0.927 0.454,0.867 0.709,0.696 0.88,0.441 0.94,0.14 0.94,0.14 0.94,0.114 0.88,-0.187 0.709,-0.442 0.454,-0.613 0.152,-0.673 0.152,-0.673 -0.152,-0.673 -0.343,-0.648 -0.533,-0.572 -0.699,-0.457 -0.699,-0.229 -0.714,-0.151 -0.758,-0.085 -0.824,-0.041 -0.902,-0.025 -0.902,-0.025 -0.953,-0.025 -0.953,-0.622 -1.003,-0.673 -1.854,-0.673 -1.905,-0.622 -1.905,0.876 -1.854,0.927 -1.003,0.927 -0.953,0.876 -0.953,0.279 -0.902,0.279 -0.824,0.295 -0.758,0.339 -0.714,0.405 -0.699,0.483 -0.699,0.483 -0.699,0.711 -0.533,0.826 -0.343,0.889 -0.152,0.927
  Bottom Layer region: 0.152,0.927 0.454,0.867 0.709,0.696 0.88,0.441 0.94,0.14 0.94,0.14 0.94,0.114 0.88,-0.187 0.709,-0.442 0.454,-0.613 0.152,-0.673 0.152,-0.673 -0.152,-0.673 -0.343,-0.648 -0.533,-0.572 -0.699,-0.457 -0.699,-0.229 -0.714,-0.151 -0.758,-0.085 -0.824,-0.041 -0.902,-0.025 -0.902,-0.025 -0.953,-0.025 -0.953,-0.622 -1.003,-0.673 -1.854,-0.673 -1.905,-0.622 -1.905,0.876 -1.854,0.927 -1.003,0.927 -0.953,0.876 -0.953,0.279 -0.902,0.279 -0.824,0.295 -0.758,0.339 -0.714,0.405 -0.699,0.483 -0.699,0.483 -0.699,0.711 -0.533,0.826 -0.343,0.889 -0.152,0.927
  Bottom Layer region: 0.152,0.927 0.454,0.867 0.709,0.696 0.88,0.441 0.94,0.14 0.94,0.14 0.94,0.114 0.88,-0.187 0.709,-0.442 0.454,-0.613 0.152,-0.673 0.152,-0.673 -0.152,-0.673 -0.343,-0.648 -0.533,-0.572 -0.699,-0.457 -0.699,-0.229 -0.714,-0.151 -0.758,-0.085 -0.824,-0.041 -0.902,-0.025 -0.902,-0.025 -0.953,-0.025 -0.953,-0.622 -1.003,-0.673 -1.854,-0.673 -1.905,-0.622 -1.905,0.876 -1.854,0.927 -1.003,0.927 -0.953,0.876 -0.953,0.279 -0.902,0.279 -0.824,0.295 -0.758,0.339 -0.714,0.405 -0.699,0.483 -0.699,0.483 -0.699,0.711 -0.533,0.826 -0.343,0.889 -0.152,0.927
  Bottom Layer region: 0.152,0.927 0.454,0.867 0.709,0.696 0.88,0.441 0.94,0.14 0.94,0.14 0.94,0.114 0.88,-0.187 0.709,-0.442 0.454,-0.613 0.152,-0.673 0.152,-0.673 -0.152,-0.673 -0.343,-0.648 -0.533,-0.572 -0.699,-0.457 -0.699,-0.229 -0.714,-0.151 -0.758,-0.085 -0.824,-0.041 -0.902,-0.025 -0.902,-0.025 -0.953,-0.025 -0.953,-0.622 -1.003,-0.673 -1.854,-0.673 -1.905,-0.622 -1.905,0.876 -1.854,0.927 -1.003,0.927 -0.953,0.876 -0.953,0.279 -0.902,0.279 -0.824,0.295 -0.758,0.339 -0.714,0.405 -0.699,0.483 -0.699,0.483 -0.699,0.711 -0.533,0.826 -0.343,0.889 -0.152,0.927
  Bottom Layer region: 0.152,0.927 0.454,0.867 0.709,0.696 0.88,0.441 0.94,0.14 0.94,0.14 0.94,0.114 0.88,-0.187 0.709,-0.442 0.454,-0.613 0.152,-0.673 0.152,-0.673 -0.152,-0.673 -0.343,-0.648 -0.533,-0.572 -0.699,-0.457 -0.699,-0.229 -0.714,-0.151 -0.758,-0.085 -0.824,-0.041 -0.902,-0.025 -0.902,-0.025 -0.953,-0.025 -0.953,-0.622 -1.003,-0.673 -1.854,-0.673 -1.905,-0.622 -1.905,0.876 -1.854,0.927 -1.003,0.927 -0.953,0.876 -0.953,0.279 -0.902,0.279 -0.824,0.295 -0.758,0.339 -0.714,0.405 -0.699,0.483 -0.699,0.483 -0.699,0.711 -0.533,0.826 -0.343,0.889 -0.152,0.927
  Bottom Layer region: 0.152,3.467 0.454,3.407 0.709,3.236 0.88,2.981 0.94,2.68 0.94,2.68 0.94,2.654 0.88,2.353 0.709,2.098 0.454,1.927 0.152,1.867 0.152,1.867 -0.152,1.867 -0.343,1.892 -0.533,1.968 -0.699,2.083 -0.699,2.311 -0.714,2.389 -0.758,2.455 -0.824,2.499 -0.902,2.515 -0.902,2.515 -0.953,2.515 -0.953,1.918 -1.003,1.867 -1.854,1.867 -1.905,1.918 -1.905,3.416 -1.854,3.467 -1.003,3.467 -0.953,3.416 -0.953,2.819 -0.902,2.819 -0.824,2.835 -0.758,2.879 -0.714,2.945 -0.699,3.023 -0.699,3.023 -0.699,3.251 -0.533,3.365 -0.343,3.429 -0.152,3.467
  Bottom Layer region: 0.152,3.467 0.454,3.407 0.709,3.236 0.88,2.981 0.94,2.68 0.94,2.68 0.94,2.654 0.88,2.353 0.709,2.098 0.454,1.927 0.152,1.867 0.152,1.867 -0.152,1.867 -0.343,1.892 -0.533,1.968 -0.699,2.083 -0.699,2.311 -0.714,2.389 -0.758,2.455 -0.824,2.499 -0.902,2.515 -0.902,2.515 -0.953,2.515 -0.953,1.918 -1.003,1.867 -1.854,1.867 -1.905,1.918 -1.905,3.416 -1.854,3.467 -1.003,3.467 -0.953,3.416 -0.953,2.819 -0.902,2.819 -0.824,2.835 -0.758,2.879 -0.714,2.945 -0.699,3.023 -0.699,3.023 -0.699,3.251 -0.533,3.365 -0.343,3.429 -0.152,3.467
  Bottom Layer region: 0.152,3.467 0.454,3.407 0.709,3.236 0.88,2.981 0.94,2.68 0.94,2.68 0.94,2.654 0.88,2.353 0.709,2.098 0.454,1.927 0.152,1.867 0.152,1.867 -0.152,1.867 -0.343,1.892 -0.533,1.968 -0.699,2.083 -0.699,2.311 -0.714,2.389 -0.758,2.455 -0.824,2.499 -0.902,2.515 -0.902,2.515 -0.953,2.515 -0.953,1.918 -1.003,1.867 -1.854,1.867 -1.905,1.918 -1.905,3.416 -1.854,3.467 -1.003,3.467 -0.953,3.416 -0.953,2.819 -0.902,2.819 -0.824,2.835 -0.758,2.879 -0.714,2.945 -0.699,3.023 -0.699,3.023 -0.699,3.251 -0.533,3.365 -0.343,3.429 -0.152,3.467
  Bottom Layer region: 0.152,3.467 0.454,3.407 0.709,3.236 0.88,2.981 0.94,2.68 0.94,2.68 0.94,2.654 0.88,2.353 0.709,2.098 0.454,1.927 0.152,1.867 0.152,1.867 -0.152,1.867 -0.343,1.892 -0.533,1.968 -0.699,2.083 -0.699,2.311 -0.714,2.389 -0.758,2.455 -0.824,2.499 -0.902,2.515 -0.902,2.515 -0.953,2.515 -0.953,1.918 -1.003,1.867 -1.854,1.867 -1.905,1.918 -1.905,3.416 -1.854,3.467 -1.003,3.467 -0.953,3.416 -0.953,2.819 -0.902,2.819 -0.824,2.835 -0.758,2.879 -0.714,2.945 -0.699,3.023 -0.699,3.023 -0.699,3.251 -0.533,3.365 -0.343,3.429 -0.152,3.467
  Bottom Layer region: 0.152,3.467 0.454,3.407 0.709,3.236 0.88,2.981 0.94,2.68 0.94,2.68 0.94,2.654 0.88,2.353 0.709,2.098 0.454,1.927 0.152,1.867 0.152,1.867 -0.152,1.867 -0.343,1.892 -0.533,1.968 -0.699,2.083 -0.699,2.311 -0.714,2.389 -0.758,2.455 -0.824,2.499 -0.902,2.515 -0.902,2.515 -0.953,2.515 -0.953,1.918 -1.003,1.867 -1.854,1.867 -1.905,1.918 -1.905,3.416 -1.854,3.467 -1.003,3.467 -0.953,3.416 -0.953,2.819 -0.902,2.819 -0.824,2.835 -0.758,2.879 -0.714,2.945 -0.699,3.023 -0.699,3.023 -0.699,3.251 -0.533,3.365 -0.343,3.429 -0.152,3.467
  Bottom Layer region: 0.152,3.467 0.454,3.407 0.709,3.236 0.88,2.981 0.94,2.68 0.94,2.68 0.94,2.654 0.88,2.353 0.709,2.098 0.454,1.927 0.152,1.867 0.152,1.867 -0.152,1.867 -0.343,1.892 -0.533,1.968 -0.699,2.083 -0.699,2.311 -0.714,2.389 -0.758,2.455 -0.824,2.499 -0.902,2.515 -0.902,2.515 -0.953,2.515 -0.953,1.918 -1.003,1.867 -1.854,1.867 -1.905,1.918 -1.905,3.416 -1.854,3.467 -1.003,3.467 -0.953,3.416 -0.953,2.819 -0.902,2.819 -0.824,2.835 -0.758,2.879 -0.714,2.945 -0.699,3.023 -0.699,3.023 -0.699,3.251 -0.533,3.365 -0.343,3.429 -0.152,3.467
  Bottom Layer region: 0.152,3.467 0.454,3.407 0.709,3.236 0.88,2.981 0.94,2.68 0.94,2.68 0.94,2.654 0.88,2.353 0.709,2.098 0.454,1.927 0.152,1.867 0.152,1.867 -0.152,1.867 -0.343,1.892 -0.533,1.968 -0.699,2.083 -0.699,2.311 -0.714,2.389 -0.758,2.455 -0.824,2.499 -0.902,2.515 -0.902,2.515 -0.953,2.515 -0.953,1.918 -1.003,1.867 -1.854,1.867 -1.905,1.918 -1.905,3.416 -1.854,3.467 -1.003,3.467 -0.953,3.416 -0.953,2.819 -0.902,2.819 -0.824,2.835 -0.758,2.879 -0.714,2.945 -0.699,3.023 -0.699,3.023 -0.699,3.251 -0.533,3.365 -0.343,3.429 -0.152,3.467
  Bottom Layer region: 0.152,6.007 0.454,5.947 0.709,5.776 0.88,5.521 0.94,5.22 0.94,5.22 0.94,5.194 0.88,4.893 0.709,4.638 0.454,4.467 0.152,4.407 0.152,4.407 -0.152,4.407 -0.343,4.432 -0.533,4.508 -0.699,4.623 -0.699,4.851 -0.714,4.929 -0.758,4.995 -0.824,5.039 -0.902,5.055 -0.902,5.055 -0.953,5.055 -0.953,4.458 -1.003,4.407 -1.854,4.407 -1.905,4.458 -1.905,5.956 -1.854,6.007 -1.003,6.007 -0.953,5.956 -0.953,5.359 -0.902,5.359 -0.824,5.375 -0.758,5.419 -0.714,5.485 -0.699,5.563 -0.699,5.563 -0.699,5.791 -0.533,5.905 -0.343,5.969 -0.152,6.007
  Bottom Layer region: 0.152,6.007 0.454,5.947 0.709,5.776 0.88,5.521 0.94,5.22 0.94,5.22 0.94,5.194 0.88,4.893 0.709,4.638 0.454,4.467 0.152,4.407 0.152,4.407 -0.152,4.407 -0.343,4.432 -0.533,4.508 -0.699,4.623 -0.699,4.851 -0.714,4.929 -0.758,4.995 -0.824,5.039 -0.902,5.055 -0.902,5.055 -0.953,5.055 -0.953,4.458 -1.003,4.407 -1.854,4.407 -1.905,4.458 -1.905,5.956 -1.854,6.007 -1.003,6.007 -0.953,5.956 -0.953,5.359 -0.902,5.359 -0.824,5.375 -0.758,5.419 -0.714,5.485 -0.699,5.563 -0.699,5.563 -0.699,5.791 -0.533,5.905 -0.343,5.969 -0.152,6.007
  Bottom Layer region: 0.152,6.007 0.454,5.947 0.709,5.776 0.88,5.521 0.94,5.22 0.94,5.22 0.94,5.194 0.88,4.893 0.709,4.638 0.454,4.467 0.152,4.407 0.152,4.407 -0.152,4.407 -0.343,4.432 -0.533,4.508 -0.699,4.623 -0.699,4.851 -0.714,4.929 -0.758,4.995 -0.824,5.039 -0.902,5.055 -0.902,5.055 -0.953,5.055 -0.953,4.458 -1.003,4.407 -1.854,4.407 -1.905,4.458 -1.905,5.956 -1.854,6.007 -1.003,6.007 -0.953,5.956 -0.953,5.359 -0.902,5.359 -0.824,5.375 -0.758,5.419 -0.714,5.485 -0.699,5.563 -0.699,5.563 -0.699,5.791 -0.533,5.905 -0.343,5.969 -0.152,6.007
  Bottom Layer region: 0.152,6.007 0.454,5.947 0.709,5.776 0.88,5.521 0.94,5.22 0.94,5.22 0.94,5.194 0.88,4.893 0.709,4.638 0.454,4.467 0.152,4.407 0.152,4.407 -0.152,4.407 -0.343,4.432 -0.533,4.508 -0.699,4.623 -0.699,4.851 -0.714,4.929 -0.758,4.995 -0.824,5.039 -0.902,5.055 -0.902,5.055 -0.953,5.055 -0.953,4.458 -1.003,4.407 -1.854,4.407 -1.905,4.458 -1.905,5.956 -1.854,6.007 -1.003,6.007 -0.953,5.956 -0.953,5.359 -0.902,5.359 -0.824,5.375 -0.758,5.419 -0.714,5.485 -0.699,5.563 -0.699,5.563 -0.699,5.791 -0.533,5.905 -0.343,5.969 -0.152,6.007
  Bottom Layer region: 0.152,6.007 0.454,5.947 0.709,5.776 0.88,5.521 0.94,5.22 0.94,5.22 0.94,5.194 0.88,4.893 0.709,4.638 0.454,4.467 0.152,4.407 0.152,4.407 -0.152,4.407 -0.343,4.432 -0.533,4.508 -0.699,4.623 -0.699,4.851 -0.714,4.929 -0.758,4.995 -0.824,5.039 -0.902,5.055 -0.902,5.055 -0.953,5.055 -0.953,4.458 -1.003,4.407 -1.854,4.407 -1.905,4.458 -1.905,5.956 -1.854,6.007 -1.003,6.007 -0.953,5.956 -0.953,5.359 -0.902,5.359 -0.824,5.375 -0.758,5.419 -0.714,5.485 -0.699,5.563 -0.699,5.563 -0.699,5.791 -0.533,5.905 -0.343,5.969 -0.152,6.007
  Bottom Layer region: 0.152,6.007 0.454,5.947 0.709,5.776 0.88,5.521 0.94,5.22 0.94,5.22 0.94,5.194 0.88,4.893 0.709,4.638 0.454,4.467 0.152,4.407 0.152,4.407 -0.152,4.407 -0.343,4.432 -0.533,4.508 -0.699,4.623 -0.699,4.851 -0.714,4.929 -0.758,4.995 -0.824,5.039 -0.902,5.055 -0.902,5.055 -0.953,5.055 -0.953,4.458 -1.003,4.407 -1.854,4.407 -1.905,4.458 -1.905,5.956 -1.854,6.007 -1.003,6.007 -0.953,5.956 -0.953,5.359 -0.902,5.359 -0.824,5.375 -0.758,5.419 -0.714,5.485 -0.699,5.563 -0.699,5.563 -0.699,5.791 -0.533,5.905 -0.343,5.969 -0.152,6.007
  Bottom Layer region: 0.152,6.007 0.454,5.947 0.709,5.776 0.88,5.521 0.94,5.22 0.94,5.22 0.94,5.194 0.88,4.893 0.709,4.638 0.454,4.467 0.152,4.407 0.152,4.407 -0.152,4.407 -0.343,4.432 -0.533,4.508 -0.699,4.623 -0.699,4.851 -0.714,4.929 -0.758,4.995 -0.824,5.039 -0.902,5.055 -0.902,5.055 -0.953,5.055 -0.953,4.458 -1.003,4.407 -1.854,4.407 -1.905,4.458 -1.905,5.956 -1.854,6.007 -1.003,6.007 -0.953,5.956 -0.953,5.359 -0.902,5.359 -0.824,5.375 -0.758,5.419 -0.714,5.485 -0.699,5.563 -0.699,5.563 -0.699,5.791 -0.533,5.905 -0.343,5.969 -0.152,6.007
  Bottom Layer region: 0.152,8.547 0.454,8.487 0.709,8.316 0.88,8.061 0.94,7.76 0.94,7.76 0.94,7.734 0.88,7.433 0.709,7.178 0.454,7.007 0.152,6.947 0.152,6.947 -0.152,6.947 -0.343,6.972 -0.533,7.048 -0.699,7.163 -0.699,7.391 -0.714,7.469 -0.758,7.535 -0.824,7.579 -0.902,7.595 -0.902,7.595 -0.953,7.595 -0.953,6.998 -1.003,6.947 -1.854,6.947 -1.905,6.998 -1.905,8.496 -1.854,8.547 -1.003,8.547 -0.953,8.496 -0.953,7.899 -0.902,7.899 -0.824,7.915 -0.758,7.959 -0.714,8.025 -0.699,8.103 -0.699,8.103 -0.699,8.331 -0.533,8.445 -0.343,8.509 -0.152,8.547
  Bottom Layer region: 0.152,8.547 0.454,8.487 0.709,8.316 0.88,8.061 0.94,7.76 0.94,7.76 0.94,7.734 0.88,7.433 0.709,7.178 0.454,7.007 0.152,6.947 0.152,6.947 -0.152,6.947 -0.343,6.972 -0.533,7.048 -0.699,7.163 -0.699,7.391 -0.714,7.469 -0.758,7.535 -0.824,7.579 -0.902,7.595 -0.902,7.595 -0.953,7.595 -0.953,6.998 -1.003,6.947 -1.854,6.947 -1.905,6.998 -1.905,8.496 -1.854,8.547 -1.003,8.547 -0.953,8.496 -0.953,7.899 -0.902,7.899 -0.824,7.915 -0.758,7.959 -0.714,8.025 -0.699,8.103 -0.699,8.103 -0.699,8.331 -0.533,8.445 -0.343,8.509 -0.152,8.547
  Bottom Layer region: 0.152,8.547 0.454,8.487 0.709,8.316 0.88,8.061 0.94,7.76 0.94,7.76 0.94,7.734 0.88,7.433 0.709,7.178 0.454,7.007 0.152,6.947 0.152,6.947 -0.152,6.947 -0.343,6.972 -0.533,7.048 -0.699,7.163 -0.699,7.391 -0.714,7.469 -0.758,7.535 -0.824,7.579 -0.902,7.595 -0.902,7.595 -0.953,7.595 -0.953,6.998 -1.003,6.947 -1.854,6.947 -1.905,6.998 -1.905,8.496 -1.854,8.547 -1.003,8.547 -0.953,8.496 -0.953,7.899 -0.902,7.899 -0.824,7.915 -0.758,7.959 -0.714,8.025 -0.699,8.103 -0.699,8.103 -0.699,8.331 -0.533,8.445 -0.343,8.509 -0.152,8.547
  Bottom Layer region: 0.152,8.547 0.454,8.487 0.709,8.316 0.88,8.061 0.94,7.76 0.94,7.76 0.94,7.734 0.88,7.433 0.709,7.178 0.454,7.007 0.152,6.947 0.152,6.947 -0.152,6.947 -0.343,6.972 -0.533,7.048 -0.699,7.163 -0.699,7.391 -0.714,7.469 -0.758,7.535 -0.824,7.579 -0.902,7.595 -0.902,7.595 -0.953,7.595 -0.953,6.998 -1.003,6.947 -1.854,6.947 -1.905,6.998 -1.905,8.496 -1.854,8.547 -1.003,8.547 -0.953,8.496 -0.953,7.899 -0.902,7.899 -0.824,7.915 -0.758,7.959 -0.714,8.025 -0.699,8.103 -0.699,8.103 -0.699,8.331 -0.533,8.445 -0.343,8.509 -0.152,8.547
  Bottom Layer region: 0.152,8.547 0.454,8.487 0.709,8.316 0.88,8.061 0.94,7.76 0.94,7.76 0.94,7.734 0.88,7.433 0.709,7.178 0.454,7.007 0.152,6.947 0.152,6.947 -0.152,6.947 -0.343,6.972 -0.533,7.048 -0.699,7.163 -0.699,7.391 -0.714,7.469 -0.758,7.535 -0.824,7.579 -0.902,7.595 -0.902,7.595 -0.953,7.595 -0.953,6.998 -1.003,6.947 -1.854,6.947 -1.905,6.998 -1.905,8.496 -1.854,8.547 -1.003,8.547 -0.953,8.496 -0.953,7.899 -0.902,7.899 -0.824,7.915 -0.758,7.959 -0.714,8.025 -0.699,8.103 -0.699,8.103 -0.699,8.331 -0.533,8.445 -0.343,8.509 -0.152,8.547
  Bottom Layer region: 0.152,8.547 0.454,8.487 0.709,8.316 0.88,8.061 0.94,7.76 0.94,7.76 0.94,7.734 0.88,7.433 0.709,7.178 0.454,7.007 0.152,6.947 0.152,6.947 -0.152,6.947 -0.343,6.972 -0.533,7.048 -0.699,7.163 -0.699,7.391 -0.714,7.469 -0.758,7.535 -0.824,7.579 -0.902,7.595 -0.902,7.595 -0.953,7.595 -0.953,6.998 -1.003,6.947 -1.854,6.947 -1.905,6.998 -1.905,8.496 -1.854,8.547 -1.003,8.547 -0.953,8.496 -0.953,7.899 -0.902,7.899 -0.824,7.915 -0.758,7.959 -0.714,8.025 -0.699,8.103 -0.699,8.103 -0.699,8.331 -0.533,8.445 -0.343,8.509 -0.152,8.547
  Bottom Layer region: 0.152,8.547 0.454,8.487 0.709,8.316 0.88,8.061 0.94,7.76 0.94,7.76 0.94,7.734 0.88,7.433 0.709,7.178 0.454,7.007 0.152,6.947 0.152,6.947 -0.152,6.947 -0.343,6.972 -0.533,7.048 -0.699,7.163 -0.699,7.391 -0.714,7.469 -0.758,7.535 -0.824,7.579 -0.902,7.595 -0.902,7.595 -0.953,7.595 -0.953,6.998 -1.003,6.947 -1.854,6.947 -1.905,6.998 -1.905,8.496 -1.854,8.547 -1.003,8.547 -0.953,8.496 -0.953,7.899 -0.902,7.899 -0.824,7.915 -0.758,7.959 -0.714,8.025 -0.699,8.103 -0.699,8.103 -0.699,8.331 -0.533,8.445 -0.343,8.509 -0.152,8.547
  Bottom Layer region: 0.152,11.087 0.454,11.027 0.709,10.856 0.88,10.601 0.94,10.3 0.94,10.3 0.94,10.274 0.88,9.973 0.709,9.718 0.454,9.547 0.152,9.487 0.152,9.487 -0.152,9.487 -0.343,9.512 -0.533,9.588 -0.699,9.703 -0.699,9.931 -0.714,10.009 -0.758,10.075 -0.824,10.119 -0.902,10.135 -0.902,10.135 -0.953,10.135 -0.953,9.538 -1.003,9.487 -1.854,9.487 -1.905,9.538 -1.905,11.036 -1.854,11.087 -1.003,11.087 -0.953,11.036 -0.953,10.439 -0.902,10.439 -0.824,10.455 -0.758,10.499 -0.714,10.565 -0.699,10.643 -0.699,10.643 -0.699,10.871 -0.533,10.986 -0.343,11.049 -0.152,11.087
  Bottom Layer region: 0.152,11.087 0.454,11.027 0.709,10.856 0.88,10.601 0.94,10.3 0.94,10.3 0.94,10.274 0.88,9.973 0.709,9.718 0.454,9.547 0.152,9.487 0.152,9.487 -0.152,9.487 -0.343,9.512 -0.533,9.588 -0.699,9.703 -0.699,9.931 -0.714,10.009 -0.758,10.075 -0.824,10.119 -0.902,10.135 -0.902,10.135 -0.953,10.135 -0.953,9.538 -1.003,9.487 -1.854,9.487 -1.905,9.538 -1.905,11.036 -1.854,11.087 -1.003,11.087 -0.953,11.036 -0.953,10.439 -0.902,10.439 -0.824,10.455 -0.758,10.499 -0.714,10.565 -0.699,10.643 -0.699,10.643 -0.699,10.871 -0.533,10.986 -0.343,11.049 -0.152,11.087
  Bottom Layer region: 0.152,11.087 0.454,11.027 0.709,10.856 0.88,10.601 0.94,10.3 0.94,10.3 0.94,10.274 0.88,9.973 0.709,9.718 0.454,9.547 0.152,9.487 0.152,9.487 -0.152,9.487 -0.343,9.512 -0.533,9.588 -0.699,9.703 -0.699,9.931 -0.714,10.009 -0.758,10.075 -0.824,10.119 -0.902,10.135 -0.902,10.135 -0.953,10.135 -0.953,9.538 -1.003,9.487 -1.854,9.487 -1.905,9.538 -1.905,11.036 -1.854,11.087 -1.003,11.087 -0.953,11.036 -0.953,10.439 -0.902,10.439 -0.824,10.455 -0.758,10.499 -0.714,10.565 -0.699,10.643 -0.699,10.643 -0.699,10.871 -0.533,10.986 -0.343,11.049 -0.152,11.087
  Bottom Layer region: 0.152,11.087 0.454,11.027 0.709,10.856 0.88,10.601 0.94,10.3 0.94,10.3 0.94,10.274 0.88,9.973 0.709,9.718 0.454,9.547 0.152,9.487 0.152,9.487 -0.152,9.487 -0.343,9.512 -0.533,9.588 -0.699,9.703 -0.699,9.931 -0.714,10.009 -0.758,10.075 -0.824,10.119 -0.902,10.135 -0.902,10.135 -0.953,10.135 -0.953,9.538 -1.003,9.487 -1.854,9.487 -1.905,9.538 -1.905,11.036 -1.854,11.087 -1.003,11.087 -0.953,11.036 -0.953,10.439 -0.902,10.439 -0.824,10.455 -0.758,10.499 -0.714,10.565 -0.699,10.643 -0.699,10.643 -0.699,10.871 -0.533,10.986 -0.343,11.049 -0.152,11.087